# EAGLE board femto (EAGLE 6.4)
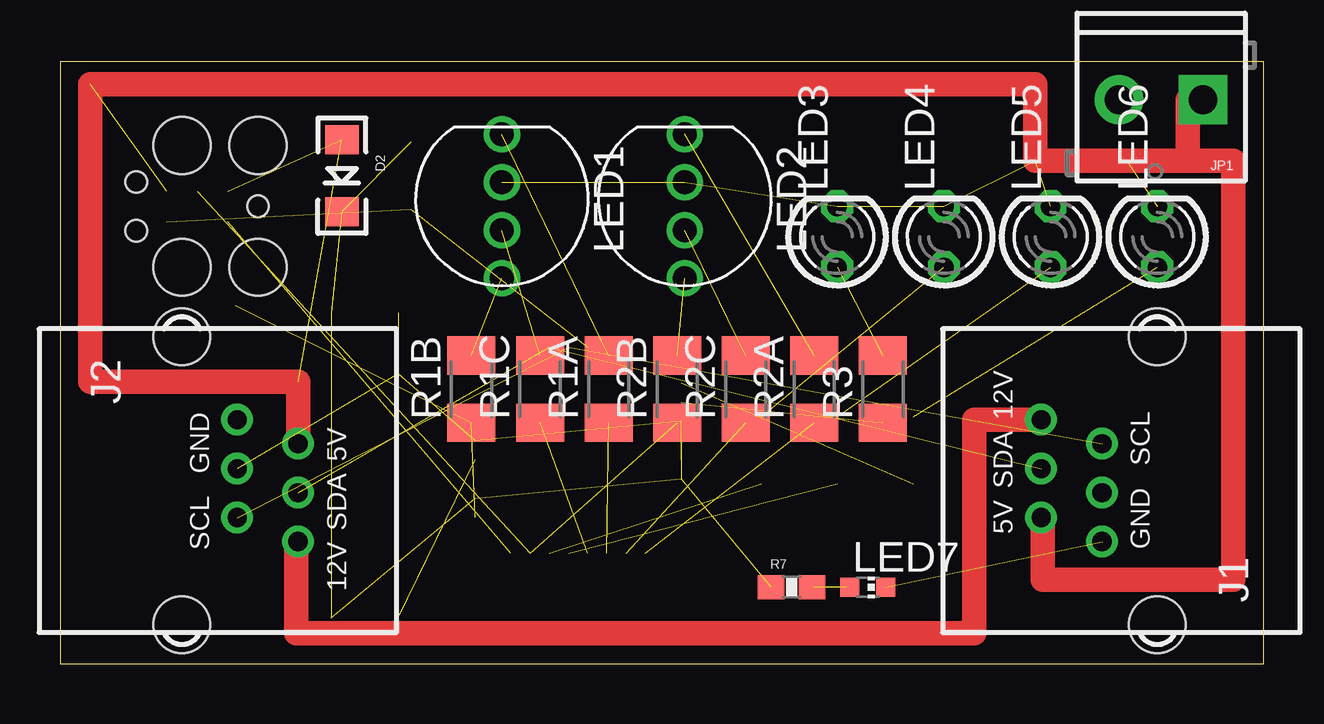
[diagram p0: board, top side]
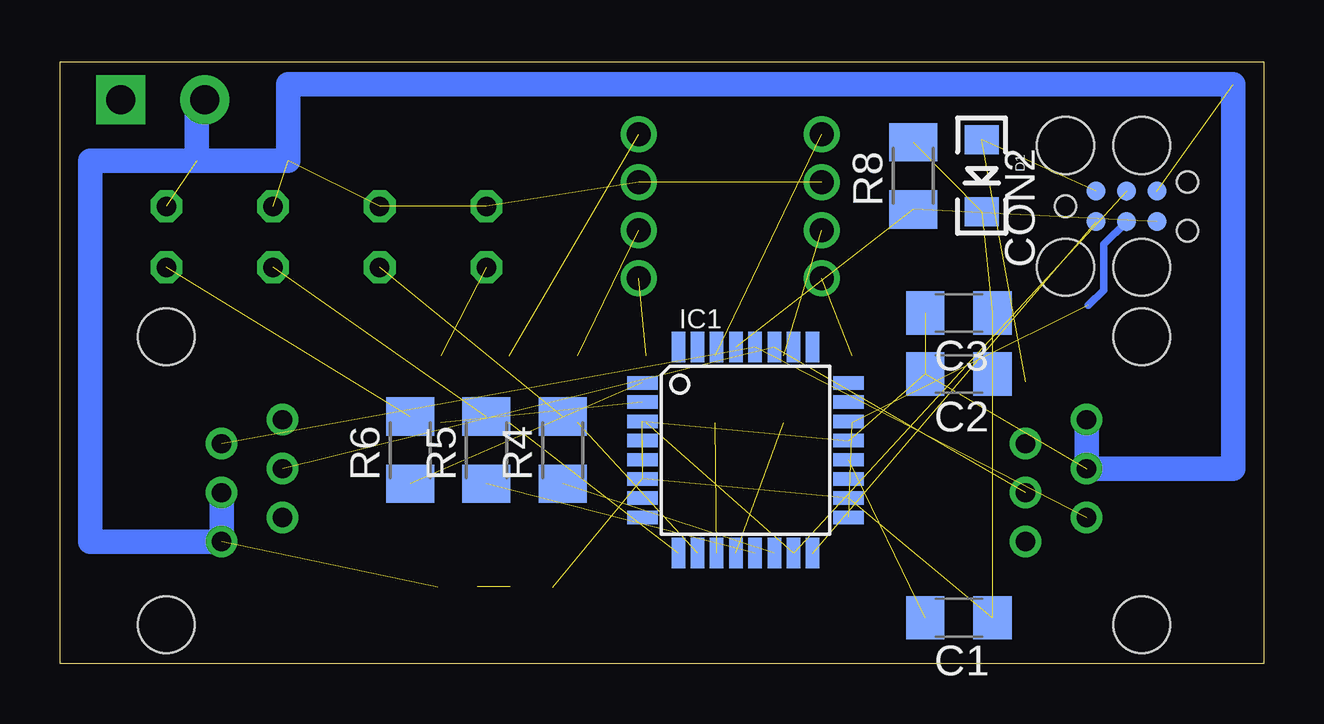
[diagram p1: board, bottom side, seen from below]

Size 50.15 x 25.07 mm. Coordinates in mm from the lower left corner, seen from the top.
Outline: 0,0 50.15,0 50.15,25.07 0,25.07 0,0
Copper layers (1*16): Top 0.035mm / dielectric 1.5mm / Bottom 0.035mm
Design rules "Fusion_eagle_rule_v1.1": minimum track width 6mil, minimum drill 12mil, track to track 6mil, track to pad 6mil, pad to pad 6mil, via to via 6mil, smd to smd 0mil, copper to edge 10mil, drill to drill 10mil, minimum pad ring 10mil, minimum via ring 6mil, stop-mask expansion 2mil, vias tented up to drill 100mil, thermal gap 10mil
Net classes: 0 default: width 0.203 mm; 1 power: width 0.457 mm; 2 i2c: width 0.305 mm; 3 fine: width 0.305 mm
vRestrict: area 15.2,2.5 to 19.1,15.2; area 24.1,2.5 to 27.9,15.2; area 15.2,2.5 to 27.9,6.4; area 15.2,11.4 to 27.9,15.2; area 2.5,16.5 to 7.6,21.6

## Footprints (pad centres in the part's own frame; a part is rotated, then mirrored left to right if it is on the bottom)
C1206 = smd 1.6 x 1.8: 1 -1.4,0; 2 1.4,0
TC2030-MCP = smd 0.787 x 0.787: 5V 1.27,0.635; GND 3.81,0.635; MISO 1.27,-0.635; MOSI 2.54,0.635; RESET 3.81,-0.635; SCK 2.54,-0.635 | hole 0.889: 0,0; 5.08,-1.016; 5.08,1.016 | hole 2.375: 0,2.54; 0,-2.54; 3.175,-2.54; 3.175,2.54
LED-1206 = smd 1.2 x 1.4: A -1.5,0; C 1.5,0
TQFP32-08 = smd 1.27 x 0.559: 1 -4.293,2.8; 2 -4.293,2; 3 -4.293,1.2; 4 -4.293,0.4; 5 -4.293,-0.4; 6 -4.293,-1.2; 7 -4.293,-2; 8 -4.293,-2.8; 17 4.293,-2.8; 18 4.293,-2; 19 4.293,-1.2; 20 4.293,-0.4; 21 4.293,0.4; 22 4.293,1.2; 23 4.293,2; 24 4.293,2.8 | smd 0.559 x 1.27: 9 -2.8,-4.293; 10 -2,-4.293; 11 -1.2,-4.293; 12 -0.4,-4.293; 13 0.4,-4.293; 14 1.2,-4.293; 15 2,-4.293; 16 2.8,-4.293; 25 2.8,4.293; 26 2,4.293; 27 1.2,4.293; 28 0.4,4.293; 29 -0.4,4.293; 30 -1.2,4.293; 31 -2,4.293; 32 -2.8,4.293
RJ12-RIGHTANGLE-I2C = drill 0.8 pad 1.3: +5V -1.54,4.84; +12V 2.54,4.84; GND1 -2.54,2.3; GND2 -0.5,2.3; SCL 1.54,2.3; SDA 0.5,4.84 | hole 2.36: -6,0; 6,0
SCREWTERMINAL-3.5MM-2 = drill 1.2 pad 2.032 square: 1 0,0 | drill 1.2 pad 2.032: 2 3.5,0
LED-TRICOLOR-THROUGHHOLE = drill 1: BLU 3,0; GND -1,0; GRN 1,0; RED -3,0
LED3MM = drill 0.813 octagon: A -1.27,0; K 1.27,0
CHIP-LED0603 = smd 0.8 x 0.8: A 0,-0.75; C 0,0.75
M1206 = smd 1.6 x 2: 1 -1.4,0; 2 1.4,0
0603-RES = smd 1.1 x 1: 1 -0.85,0; 2 0.85,0

## Placement (x,y rotation side)
C1  0.1uF  [C1206]  12.7,1.91 180 bottom
C2  0.1uF  [C1206]  12.7,12.06 180 bottom
C3  10uF  [C1206]  12.7,14.61 180 bottom
CON2  [TC2030-MCP]  8.26,19.05 0 bottom
D1  1N581D1206  [LED-1206]  11.75,20.32 270 bottom
D2  1N581D1206  [LED-1206]  11.75,20.32 270 top
IC1  MEGA8-AI  [TQFP32-08]  21.59,8.89 0 bottom
J1  RJ12RIGHTANGLE-I2C  [RJ12-RIGHTANGLE-I2C]  45.72,7.62 90 top
J2  RJ12RIGHTANGLE-I2C  [RJ12-RIGHTANGLE-I2C]  5.08,7.62 270 top
JP1  [SCREWTERMINAL-3.5MM-2]  47.62,23.5 180 top
LED1  RGB-COMMON-CATHODE  [LED-TRICOLOR-THROUGHHOLE]  18.41,19.05 270 top
LED2  RGB-COMMON-CATHODE  [LED-TRICOLOR-THROUGHHOLE]  26.04,19.05 270 top
LED3  LED3MM  [LED3MM]  32.38,17.78 90 top
LED4  LED3MM  [LED3MM]  36.83,17.78 90 top
LED5  LED3MM  [LED3MM]  41.27,17.78 90 top
LED6  LED3MM  [LED3MM]  45.72,17.78 90 top
LED7  [CHIP-LED0603]  33.66,3.17 270 top
R1A  1k  [M1206]  22.86,11.43 90 top
R1B  1k  [M1206]  17.14,11.43 90 top
R1C  1k  [M1206]  20,11.43 90 top
R2A  1k  [M1206]  31.43,11.43 90 top
R2B  1k  [M1206]  25.72,11.43 90 top
R2C  1k  [M1206]  28.57,11.43 90 top
R3  1k  [M1206]  34.29,11.43 90 top
R4  1k  [M1206]  29.21,8.89 90 bottom
R5  1k  [M1206]  32.38,8.89 90 bottom
R6  1k  [M1206]  35.56,8.89 90 bottom
R7  10k  [0603-RES]  30.48,3.17 0 top
R8  10k  [M1206]  14.61,20.32 90 bottom

## Library data of the parts
C1-C3 R1A R1B R1C R2A R2B R2C R3-R6 R8 = resistor
CON2 D1 D2 J1 J2 LED1-LED6 = lpatiny
IC1 = atmel; MPN: ATMEGA8-16AU; OC_FARNELL: 9171371; OC_NEWARK: 73M8863
JP1 R7 = SparkFun
LED7 = adafruit

## Nets
5V_A [i2c]: CON2.5V D1.A
5V_B [power]: D2.A J1.+5V J2.+5V JP1.1
+5V [power]: C1.1 C2.1 C3.1 D1.C D2.C IC1.4 IC1.6 IC1.18 R7.1 R8.2
A0: IC1.23
A1: IC1.24
A2: IC1.25
A3: IC1.26
A6: IC1.19
A7: IC1.22
B0: IC1.12 R1C.1
D2: IC1.32
D3: IC1.1 R6.1
D4: IC1.2 R3.1
D5: IC1.9 R2A.1
D6: IC1.10 R2C.1
D7: IC1.11 R1A.1
D9: IC1.13 R5.1
D10: IC1.14 R4.1
GND [power]: C2.2 C3.2 CON2.GND IC1.3 IC1.5 IC1.21 J1.GND1 J1.GND2 J2.GND1 J2.GND2 JP1.2 LED1.GND LED2.GND LED3.K LED4.K LED5.K LED6.K LED7.C
MISO: CON2.MISO IC1.16
MOSI: CON2.MOSI IC1.15 R2B.1
N$1: LED2.RED R2A.2
N$4: C1.2 IC1.20
N$7: LED2.BLU R2B.2
N$8: LED2.GRN R2C.2
N$13: J1.+12V J2.+12V
N$15: LED7.A R7.2
N$16: LED3.A R3.2
N$20: LED1.RED R1A.2
N$21: LED1.BLU R1B.2
N$22: LED1.GRN R1C.2
N$23: LED6.A R6.2
N$40: LED5.A R5.2
N$41: LED4.A R4.2
RESET: CON2.RESET IC1.29 R8.1
RX: IC1.30
SCK: CON2.SCK IC1.17 R1B.1
SCL [i2c]: IC1.28 J1.SCL J2.SCL
SDA [i2c]: IC1.27 J1.SDA J2.SDA
TX: IC1.31

## Tracks (layer width: path | path; a pad name or v marks a point on that pad's centre or on a via)
5V_A  (1 unrouted)
5V_B  (1 unrouted)
  Top 1.016: 46.99,20.95 48.9,20.95 48.9,3.49 40.96,3.49 40.96,6.08 J1.+5V | 46.99,20.95 40.64,20.95 40.64,24.13 1.27,24.13 1.27,11.75 9.92,11.75 J2.+5V | JP1.1 46.99,23.5 46.99,20.95
+5V  (9 unrouted)
B0  (1 unrouted)
D3  (1 unrouted)
D4  (1 unrouted)
D5  (1 unrouted)
D6  (1 unrouted)
D7  (1 unrouted)
D9  (1 unrouted)
D10  (1 unrouted)
  Bottom 1.016: R4.1 29.21,7.62
GND  (13 unrouted)
  Bottom 1.016: 44.45,20.95 48.9,20.95 48.9,5.08 J1.GND1 J1.GND2 | 44.45,20.95 40.64,20.95 40.64,24.13 1.27,24.13 1.27,8.12 J2.GND2 J2.GND1 | JP1.2 44.45,23.5 44.45,20.95
MISO  (1 unrouted)
MOSI  (2 unrouted)
N$1  (1 unrouted)
N$4  (1 unrouted)
N$7  (1 unrouted)
N$8  (1 unrouted)
N$13
  Top 1.016: J2.+12V 9.84,5.08 9.84,1.27 38.1,1.27 38.1,10.16 J1.+12V
N$15  (1 unrouted)
  Top 0.254: 32.77,3.2 LED7.A | 31.39,3.2 R7.2
N$16  (1 unrouted)
N$20  (1 unrouted)
N$21  (1 unrouted)
N$22  (1 unrouted)
N$23  (1 unrouted)
N$40  (1 unrouted)
N$41  (1 unrouted)
RESET  (2 unrouted)
SCK  (2 unrouted)
  Bottom 0.305: CON2.SCK 6.67,17.46 6.67,15.56 7.3,14.92
SCL  (2 unrouted)
SDA  (2 unrouted)